# Altium PCB PCB.PcbDoc
Units mil, origin at the board's own origin, x right, y up, seen from the top; angles counter-clockwise.
Board outline 3700.79 x 5236.22 mil, 2 copper layers (Top Layer, Top, Bottom Layer, Bottom); 17 components, 12 nets, 61 pads, 0 vias.
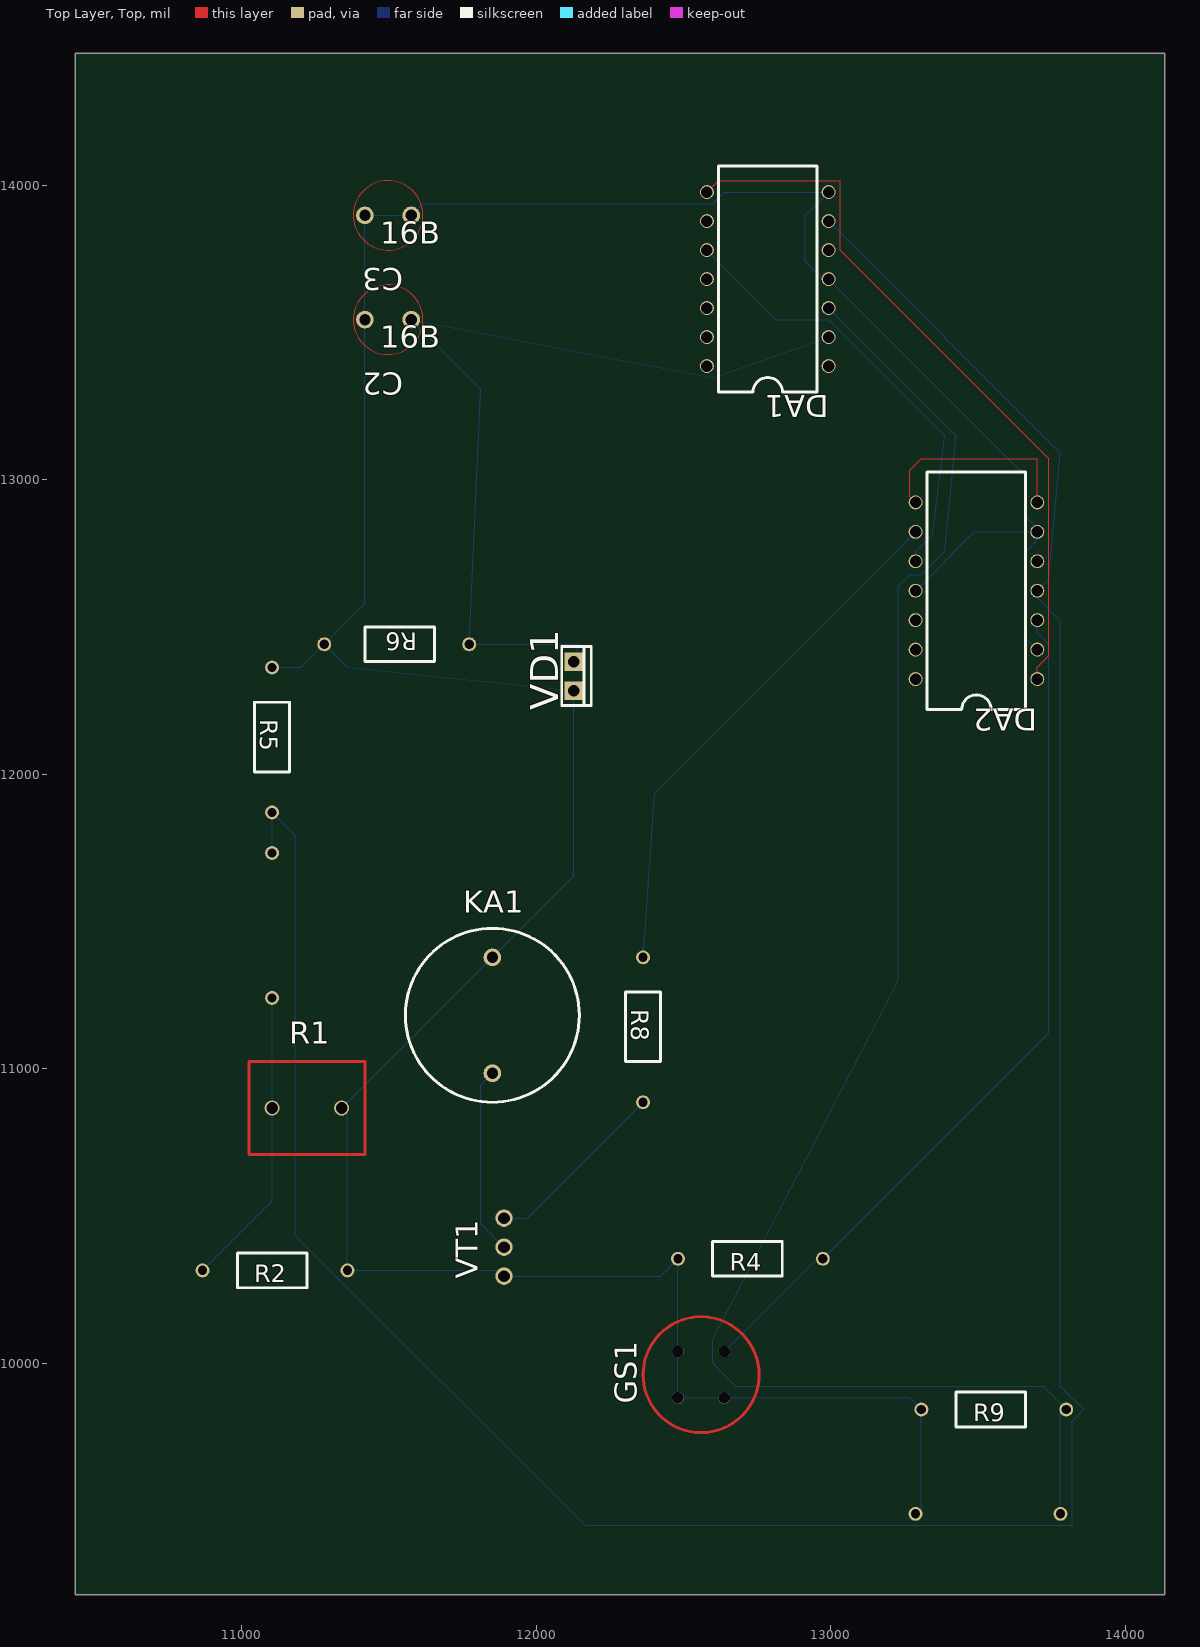
[diagram p0: Top Layer, Top view]
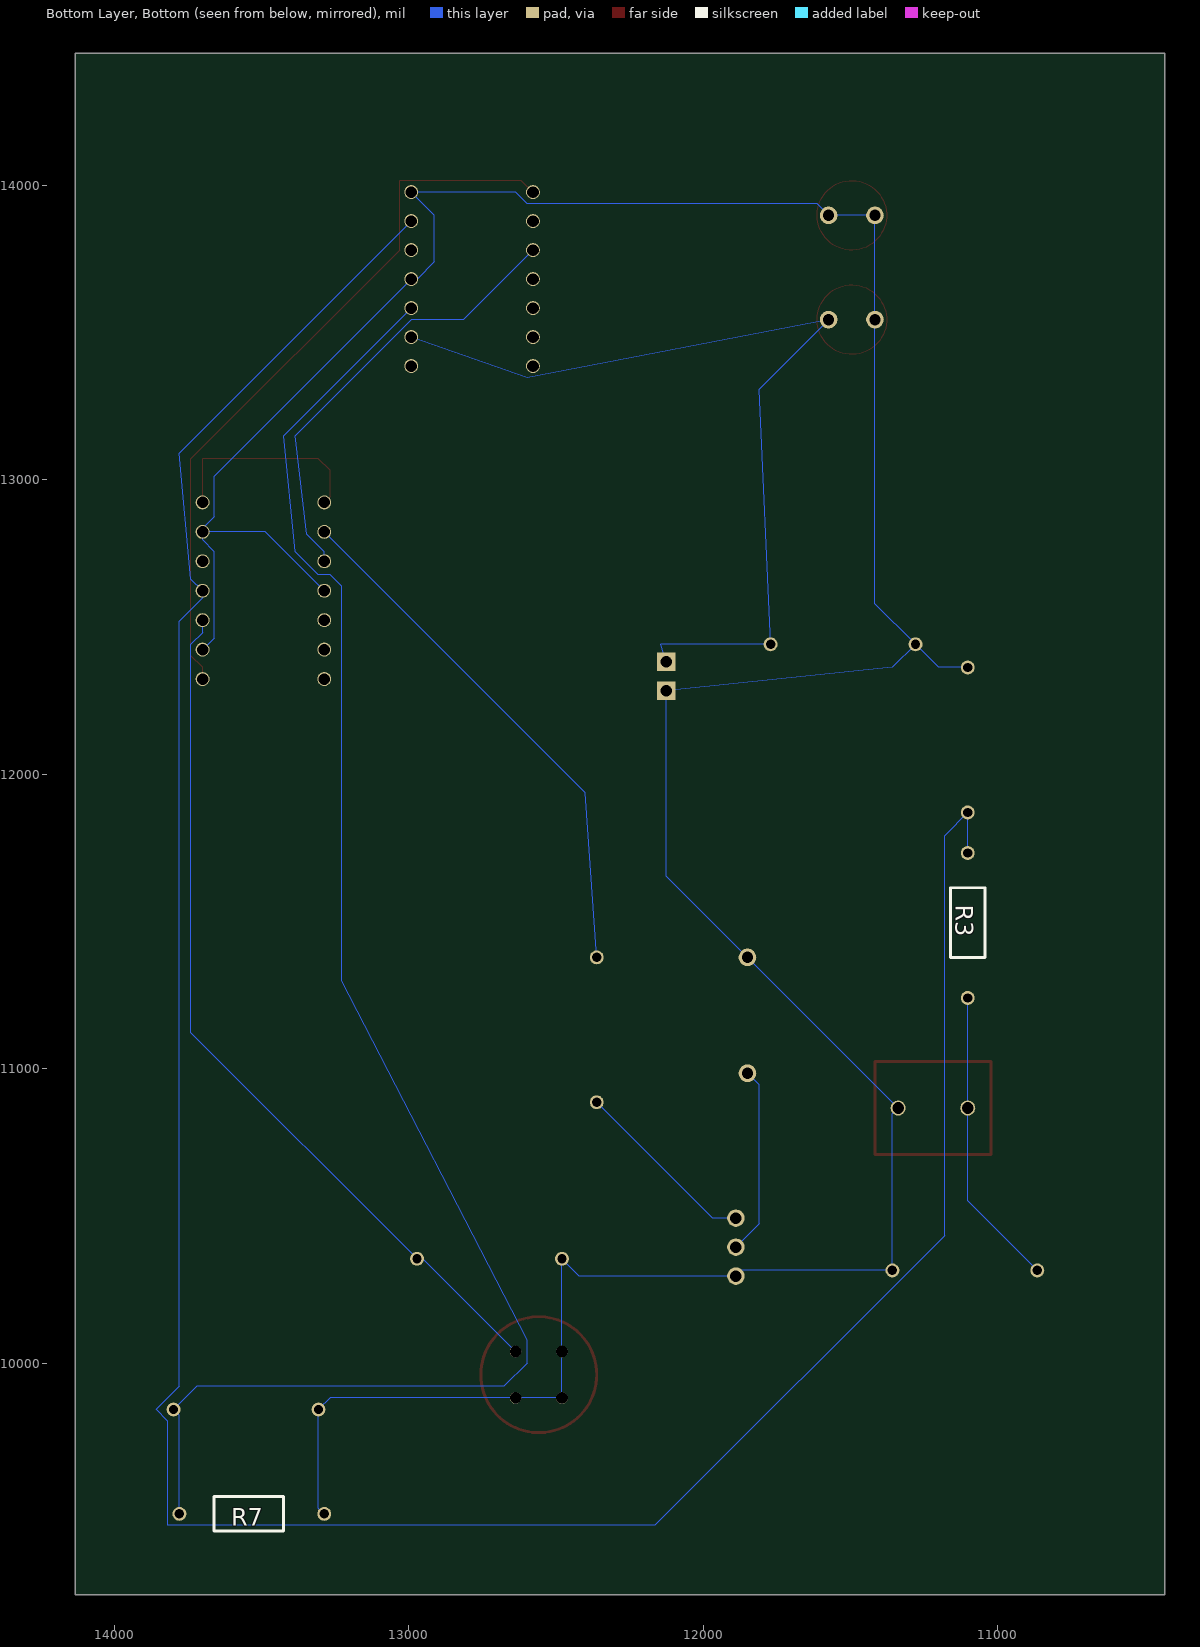
[diagram p1: Bottom Layer, Bottom view, seen from below]

## Layer stack, top to bottom
Top Solder, Top Mask: solder mask 0.4, Solder Resist, Dk 3.5
Top Layer, Top: signal copper 1.4
Dielectric 1: dielectric 12.6, FR-4, Dk 4.8
Bottom Layer, Bottom: signal copper 1.4
Bottom Solder, Bot Mask: solder mask 0.4, Solder Resist, Dk 3.5

## Board outline
10433.07,9212.6 14133.86,9212.6 14133.86,14448.82 10433.07,14448.82

## Design rules (kind name [scope] priority, off if disabled: settings)
Clearance [All] p1: gap=10 ignorepadtopadclearanceinfootprint=FALSE except(0: Arc-Hole Track-Hole SMDPad-Hole THPad-Hole Via-Hole Fill-Hole Poly-Hole Region-Hole Text-Hole; 12: Arc-Arc Arc-Track Arc-THPad Arc-Via Track-Track Track-THPad Track-Via THPad-THPad THPad-Via Via-Via)
PlaneClearance [All] p1: clearance=10
PolygonConnect [All] p1: connectstyle=Relief reliefconductorwidth=10 reliefentries=4 polygonreliefangle="90 Angle" airgapwidth=10
RoomDefinition "" [All] p1: confinementstyle=ConfineIn formatcopy=TRUE lockcomponents=FALSE outline 10433.07,9212.6 14133.86,9212.6 14133.86,14448.82 10433.07,14448.82
RoutingVias [All] p1: holewidth=28 width=50 viastyle="Through Hole" minholewidth=28 minwidth=50 maxholewidth=28 maxwidth=50
SolderMaskExpansion [All] p1: expansion=4
Width [All] p1: maxlimit=10 minlimit=10 preferedwidth=10
29 further rules are at their usual default settings.

## Components (designator, comment, footprint, x,y, rotation, side; value= is the part's Value field where it differs from the comment)
C2 "16B" CAP2 11574.8,13543.31 r180 top
C3 "16B" CAP2 11574.8,13897.64 r180 top
DA1 "" KR140UD12PATT 12992.13,13385.83 r180 top
DA2 "" K554CA3PAT 13700.79,12322.83 r180 top
GS1 "" TGS2620PATT 12480.32,9881.89 r90 top
KA1 "KPI-4332" ZP_LB1209 11850.39,11377.95 r0 top
R1 "4.7k" TERMO_RES_PATT 11102.36,10866.14 r0 top
R2 "11k" МЛТ(0.125) 10866.14,10314.96 r0 top
R3 "750" МЛТ(0.125) 11102.36,11732.28 r270 bottom
R4 "12k" МЛТ(0.125) 12480.32,10354.33 r0 top
R5 "5.6k" МЛТ(0.125) 11102.36,12362.2 r270 top
R6 "1.5M" МЛТ(0.125) 11771.65,12440.94 r180 top
R7 "47k" МЛТ(0.125) 13779.53,9488.19 r180 bottom
R8 "3k" МЛТ(0.125) 12362.2,11377.95 r270 top
R9 "47k" МЛТ(0.125) 13307.09,9842.52 r0 top
VD1 "KD521B" KD513A 12125.98,12283.46 r90 top
VT1 "KT503B" KT-13 11889.76,10393.7 r0 top

## Footprints (in the part's own frame and the unit in brackets; to place one, negate y for a bottom-side part, rotate by r counter-clockwise, add the part's x,y. Pads: shape width x height; smd on the part's side, far side on the other; paste and mask are expansions set on the pad)
CAP2 [mil]
  round 60 hole 38: 1(0,0) 2(157.48,0)
  Top Layer, Top circle w3.94: c78.74,0 r118.11
K554CA3PAT [mm]
  round 1.2 hole 1: 1(0,0) 2(0,-2.54) 3(0,-5.08) 4(0,-7.62) 5(0,-10.16) 6(0,-12.7) 7(0,-15.24) 8(10.5,-15.24) 9(10.5,-12.7) 10(10.5,-10.16) 11(10.5,-7.62) 12(10.5,-5.08) 13(10.5,-2.54) 14(10.5,0)
  silkscreen extent 1,-17.87 9.5,2.63
KD513A [mm]
  rect 1.6x1.6 hole 1: 1(0,0) 2(2.5,0)
  silkscreen extent -1.27,-1.52 3.81,1.02
KR140UD12PATT [mm]
  round 1.2 hole 1: 1(0,0) 2(0,-2.5) 3(0,-5) 4(0,-7.5) 5(0,-10) 6(0,-12.5) 7(0,-15) 8(10.5,-15) 9(10.5,-12.5) 10(10.5,-10) 11(10.5,-7.5) 12(10.5,-5) 13(10.5,-2.5) 14(10.5,0)
  silkscreen extent 1,-17.25 9.5,2.25
KT-13 [mm]
  round 1.5 hole 1: 1(0,-2.5) 2(0,0) 3(0,2.5)
TERMO_RES_PATT [mm]
  round 1.3 hole 1: 1(0,0) 2(6,0)
  Top Layer, Top lines w0.254: -2,-4 8,-4 8,4 -2,4 -2,-4
TGS2620PATT [mm]
  round 1 hole 1: 1(0,0) 2(0,-4) 3(4,-4) 4(4,0)
  Top Layer, Top lines w0.254: 2,3 ccw(c2,-2) 2,-7 ccw(c2,-2) 2,3
ZP_LB1209 [mil]
  round 60 hole 38: 1(0,0) 2(0,-393.7)
  silkscreen extent -295,-492 295,98
МЛТ(0.125) [mm]
  round 1.2 hole 0.8: 1(0,0) 2(12.5,0)
  silkscreen extent 3,-1.5 9,1.5

## Nets (pads, with @x,y where several pads share a name; then routed paths per layer and width w, separated by ;. In a path a pad name is that pad's centre, name@x,y a point inside that pad or via, vN(x,y) a via of type N, cw(c..) or ccw(c..) an arc to the next point about the centre after c; other vN are vias at no path point)
1: C2.2 C3.1 C3.2 DA1.4 DA1.7 DA2.2 DA2.6 DA2.11 GS1.1 GS1.2 GS1.4 KA1.1 R1.2 R2.2 R4.1 R5.1 R6.2 R7.2 R9.1 VD1.1 VT1.1 | length 11802.2
  Bottom Layer, Bottom w3.94: R5.1 11200.79,12362.2 R6.2 ; R7.2 13307.09,9507.87 R9.1 13267.72,9881.89 GS1.2 GS1.1 GS1.4 R4.1 12421.26,10295.28 VT1.1 11870.08,10314.96 R2.2 11358.27,10846.46 R1.2 KA1.1 12125.98,11653.54 VD1.1 11358.27,12362.2 R6.2 ; DA2.11 13487.4,12822.83 DA2.6 ; DA2.2 13661.42,12462.2 13661.42,12755.91 13700.79,12795.28 DA2.6 ; R6.2 11417.32,12578.74 C2.2 C3.2 C3.1 11614.17,13937.01 12598.43,13937.01 12637.8,13976.38 DA1.7 12913.39,13897.64 12913.39,13740.16 12972.44,13681.1 DA1.4 13661.42,13011.81 13661.42,12874.02 13700.79,12834.65 DA2.6
GND: DA1.10 DA2.10 | length 1521.5
  Bottom Layer, Bottom w3.94: DA1.10 12814.96,13543.31 12992.13,13543.31 13385.83,13149.61 13346.46,12814.96 13287.4,12755.91 DA2.10
NET00001: R1.1 R2.1 R3.2 | length 1023
  Bottom Layer, Bottom w3.94: R2.1 11102.36,10551.18 R1.1 R3.2
NET00002: KA1.2 VT1.2 | length 639.5
  Bottom Layer, Bottom w3.94: KA1.2 11811.02,10944.88 11811.02,10472.44 VT1.2
NET00003: R8.2 VT1.3 | length 635.5
  Bottom Layer, Bottom w3.94: VT1.3 11968.5,10492.13 R8.2
NET00004: DA1.3 R7.1 R9.2 | length 5633.8
  Bottom Layer, Bottom w3.94: DA1.3 13425.2,13149.61 13385.83,12755.91 13307.09,12677.17 13267.72,12677.17 13228.35,12637.8 13228.35,11299.21 12598.43,10078.74 12598.43,10000 12677.17,9921.26 13720.47,9921.26 R9.2 13779.53,9822.83 R7.1
NET00005: C2.1 DA1.2 R6.1 VD1.2 | length 3096.9
  Bottom Layer, Bottom w3.94: VD1.2 12145.67,12440.94 R6.1 11811.02,13307.09 C2.1 12598.43,13346.46 DA1.2
NET00006: DA2.3 GS1.3 R4.2 | length 2972.4
  Bottom Layer, Bottom w3.94: GS1.3 12952.76,10354.33 R4.2 13740.16,11122.05 13740.16,12440.94 13700.79,12480.32 DA2.3 DA2.3@13703.94,12519.68
NET00007: DA1.6 DA2.4 R3.1 R5.2 | length 9507.8
  Bottom Layer, Bottom w3.94: R3.1 R5.2 11181.1,11791.34 11181.1,10433.07 12165.35,9448.82 13818.9,9448.82 13818.9,9803.15 13858.27,9842.52 13779.53,9921.26 13779.53,12519.68 13700.79,12598.43 DA2.4 13740.16,12662.2 13779.53,13090.55 DA1.6
NET00008: DA2.7 DA2.8 | length 714.2
  Top Layer, Top w3.94: DA2.8 13267.72,12942.52 13267.72,13031.5 13307.09,13070.87 13700.79,13070.87 DA2.7
NET00009: DA2.9 R8.1 | length 1813.2
  Bottom Layer, Bottom w3.94: R8.1 12401.57,11937.01 DA2.9
VCC: DA1.8 DA2.1 | length 2471.8
  Top Layer, Top w3.94: DA1.8 12618.11,14015.75 13031.5,14015.75 13031.5,13779.53 13740.16,13070.87 13740.16,12401.57 13700.79,12362.2 DA2.1
pads on no net: DA1.1 DA1.5 DA1.9 DA1.11 DA1.12 DA1.13 DA1.14 DA2.5 DA2.12 DA2.13 DA2.14